# Allegro board demoa2.brd
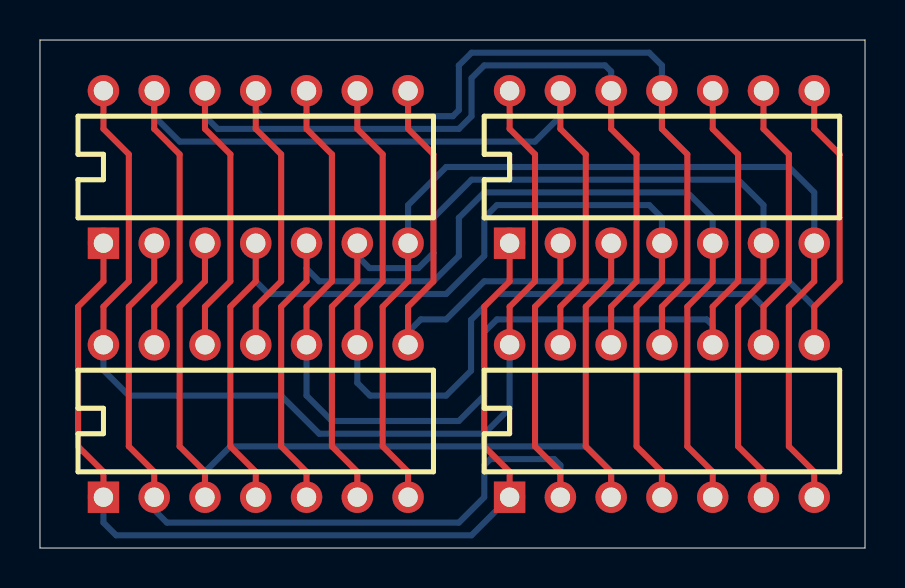
[diagram p0: board, top side]
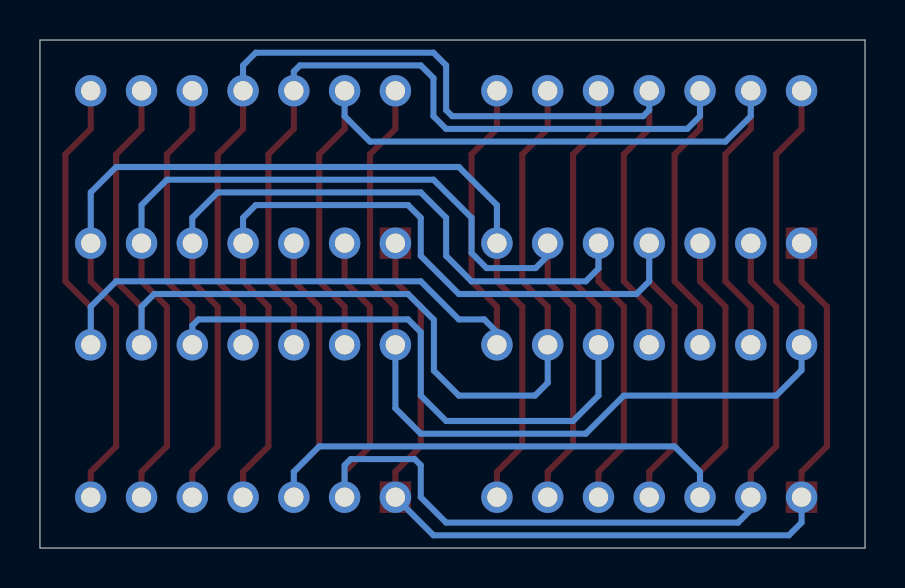
[diagram p1: board, bottom side, seen from below]

Outline 41.27 x 25.4 mm; copper layers: TOP, GND, POWER, INNER1, INNER2, BOTTOM. Coordinates in mm from the lower left corner of the outline.
Outline path: 0,25.4 0,0 41.27,0 41.27,25.4 0,25.4

## Design rules (mm)
nets with their own width: min track width 0.305; nets DAT1 DAT2 DAT3 DAT4 DAT5 DAT6 DAT7 DAT8 DAT9 DAT10 DAT11 DAT12 GND VCC

## Placement (name value [footprint] x y rotation side)
U1  7400  [DIP14]  3.17 15.24 0 top
U2  7400  [DIP14]  23.5 15.24 0 top
U3  7400  [DIP14]  3.17 2.54 0 top
U4  7400  [DIP14]  23.5 2.54 0 top

## Library data of the parts
U1-U4 = 7400

## Footprints (pads in the part's own frame, mm; a bottom-side part is the same pattern mirrored in y, then rotated)
DIP14
  rect 1.575x1.575 hole 0.965: 1(0,0)
  round 1.575 hole 0.965: 2(2.54,0) 3(5.08,0) 4(7.62,0) 5(10.16,0) 6(12.7,0) 7(15.24,0) 8(15.24,7.62) 9(12.7,7.62) 10(10.16,7.62) 11(7.62,7.62) 12(5.08,7.62) 13(2.54,7.62) 14(0,7.62)

## Nets
GND: U1.7(TP-7) U2.7(TP-7) U3.7(TP-7) U4.7(TP-7)
VCC: U1.14(TP-14) U2.14(TP-14) U3.14(TP-14) U4.14(TP-14)
DAT1: U1.2(TP-2) U2.2(TP-2) U3.2(TP-2) U4.2(TP-2)
DAT2: U1.1(TP-1) U2.1(TP-1) U3.1(TP-1) U4.1(TP-1)
DAT3: U1.3(TP-3) U2.3(TP-3) U3.3(TP-3) U4.3(TP-3)
DAT4: U1.5(TP-5) U2.5(TP-5) U3.5(TP-5) U4.5(TP-5)
DAT5: U1.4(TP-4) U2.4(TP-4) U3.4(TP-4) U4.4(TP-4)
DAT6: U1.6(TP-6) U2.6(TP-6) U3.6(TP-6) U4.6(TP-6)
DAT7: U1.10(TP-10) U2.10(TP-10) U3.10(TP-10) U4.10(TP-10)
DAT8: U1.9(TP-9) U2.9(TP-9) U3.9(TP-9) U4.9(TP-9)
DAT9: U1.8(TP-8) U2.8(TP-8) U3.8(TP-8) U4.8(TP-8)
DAT10: U1.13(TP-13) U2.13(TP-13) U3.13(TP-13) U4.13(TP-13)
DAT11: U1.12(TP-12) U2.12(TP-12) U3.12(TP-12) U4.12(TP-12)
DAT12: U1.11(TP-11) U2.11(TP-11) U3.11(TP-11) U4.11(TP-11)

## Routing (per net, layer and track width the routed paths; a pad name or vN(x,y) marks a point on that pad's centre or on a via; arc(x,y) is an arc through that point)
GND: length 53.6
  TOP w0.305: U4.7 38.73,3.81 37.46,5.08 37.46,12.06 38.73,13.34 U2.7 ; U1.7 18.42,13.34 17.15,12.06 17.15,5.08 18.42,3.81 U3.7
  BOTTOM w0.305: U1.7 18.42,17.14 20.32,19.05 37.46,19.05 38.73,17.78 U2.7
VCC: length 54.1
  TOP w0.305: U3.14 3.17,12.06 4.45,13.34 4.45,19.68 3.17,20.95 U1.14 ; U4.14 23.5,12.06 24.77,13.34 24.77,19.68 23.5,20.95 U2.14
  BOTTOM w0.305: U4.14 23.5,6.99 22.23,5.71 13.97,5.71 12.06,7.62 4.45,7.62 3.17,8.89 U3.14
DAT1: length 52.7
  TOP w0.305: U3.2 5.71,3.81 4.45,5.08 4.45,12.06 5.71,13.34 U1.2 ; U4.2 26.04,3.81 24.77,5.08 24.77,12.06 26.04,13.34 U2.2
  BOTTOM w0.305: U3.2 5.71,1.91 6.35,1.27 20.96,1.27 22.23,2.54 22.23,4.14 22.53,4.45 25.73,4.45 26.04,4.14 U4.2
DAT2: length 50.1
  TOP w0.305: U4.1 23.5,3.81 22.23,5.08 22.23,12.06 23.5,13.34 U2.1 ; U3.1 3.17,3.81 1.91,5.08 1.91,12.06 3.17,13.34 U1.1
  BOTTOM w0.305: U3.1 3.17,1.27 3.81,0.64 21.59,0.64 U4.1
DAT3: length 51.4
  TOP w0.305: U4.3 28.58,3.81 27.31,5.08 27.31,12.06 28.58,13.34 U2.3 ; U1.3 8.26,13.34 6.98,12.06 6.98,5.08 8.26,3.81 U3.3
  BOTTOM w0.305: U3.3 8.26,3.81 9.53,5.08 27.31,5.08 28.58,3.81 U4.3
DAT4: length 54.1
  TOP w0.305: U2.5 33.66,13.34 32.38,12.06 32.38,5.08 33.66,3.81 U4.5 ; U3.5 13.33,3.81 12.06,5.08 12.06,12.06 13.33,13.34 U1.5
  BOTTOM w0.305: U1.5 13.33,13.97 13.97,13.34 19.69,13.34 20.96,14.61 20.96,16.51 22.23,17.78 32.38,17.78 33.66,16.51 U2.5
DAT5: length 54.5
  TOP w0.305: U4.4 31.12,3.81 29.85,5.08 29.85,12.06 31.12,13.34 U2.4 ; U3.4 10.79,3.81 9.53,5.08 9.53,12.06 10.79,13.34 U1.4
  BOTTOM w0.305: U2.4 31.12,16.51 30.48,17.14 22.86,17.14 22.23,16.51 22.23,14.61 20.32,12.7 11.43,12.7 10.79,13.34 U1.4
DAT6: length 54
  TOP w0.305: U2.6 36.2,13.34 34.92,12.06 34.92,5.08 36.2,3.81 U4.6 ; U1.6 15.88,13.34 14.61,12.06 14.61,5.08 15.88,3.81 U3.6
  BOTTOM w0.305: U1.6 15.88,14.61 16.48,14 18.93,14 19.69,14.75 19.69,16.51 21.59,18.41 34.92,18.41 36.2,17.14 U2.6
DAT7: length 55.9
  TOP w0.305: U4.10 33.66,12.06 34.92,13.34 34.92,19.68 33.66,20.95 U2.10 ; U1.10 13.33,20.95 14.61,19.68 14.61,13.34 13.33,12.06 U3.10
  BOTTOM w0.305: U3.10 13.33,7.62 14.61,6.35 20.96,6.35 22.23,7.62 22.23,10.79 22.86,11.43 33.35,11.43 33.66,11.13 U4.10
DAT8: length 55.8
  TOP w0.305: U3.9 15.88,12.06 17.15,13.34 17.15,19.68 15.88,20.95 U1.9 ; U4.9 36.2,12.06 37.46,13.34 37.46,19.68 36.2,20.95 U2.9
  BOTTOM w0.305: U4.9 36.2,12.06 35.56,12.7 22.86,12.7 21.57,11.41 21.57,8.87 20.32,7.62 16.51,7.62 15.88,8.26 U3.9
DAT9: length 51.9
  TOP w0.305: U3.8 18.42,12.06 19.69,13.34 19.69,19.68 18.42,20.95 U1.8 ; U2.8 38.73,20.95 40,19.68 40,13.34 38.73,12.06 U4.8
  BOTTOM w0.305: U4.8 38.73,12.06 37.46,13.34 22.23,13.34 20.32,11.43 19.05,11.43 18.42,10.79 U3.8
DAT10: length 51.4
  TOP w0.305: U4.13 26.04,12.06 27.31,13.34 27.31,19.68 26.04,20.95 U2.13 ; U1.13 5.71,20.95 6.98,19.68 6.98,13.34 5.71,12.06 U3.13
  BOTTOM w0.305: U1.13 5.71,21.59 6.98,20.32 24.77,20.32 26.04,21.59 U2.13
DAT11: length 52.9
  TOP w0.305: U1.12 8.26,20.95 9.53,19.68 9.53,13.34 8.26,12.06 U3.12 ; U4.12 28.58,12.06 29.85,13.34 29.85,19.68 28.58,20.95 U2.12
  BOTTOM w0.305: U2.12 28.58,23.83 28.27,24.13 22.23,24.13 21.59,23.5 21.59,21.59 20.96,20.95 8.89,20.95 8.26,21.59 U1.12
DAT12: length 53.1
  TOP w0.305: U3.11 10.79,12.06 12.06,13.34 12.06,19.68 10.79,20.95 U1.11 ; U4.11 31.12,12.06 32.38,13.34 32.38,19.68 31.12,20.95 U2.11
  BOTTOM w0.305: U1.11 10.79,21.89 11.1,21.59 20.65,21.59 20.96,21.89 20.96,24.13 21.59,24.77 30.48,24.77 31.12,24.13 U2.11
